# Altium PCB Group24_87557913_98040483_PCB_Wacky_R_CAR.PcbDoc (part 2 of 2)
Units mm, origin at the board's own origin, x right, y up, seen from the top; angles counter-clockwise.
Board outline 64 x 85 mm, 4 copper layers (Top Layer, Int1 (GND), Int2 (PWR), Bottom Layer), stack 1.369 mm thick; 115 components, 69 nets, 321 pads, 83 vias.
Unrouted connection lines stored in the file: 71.
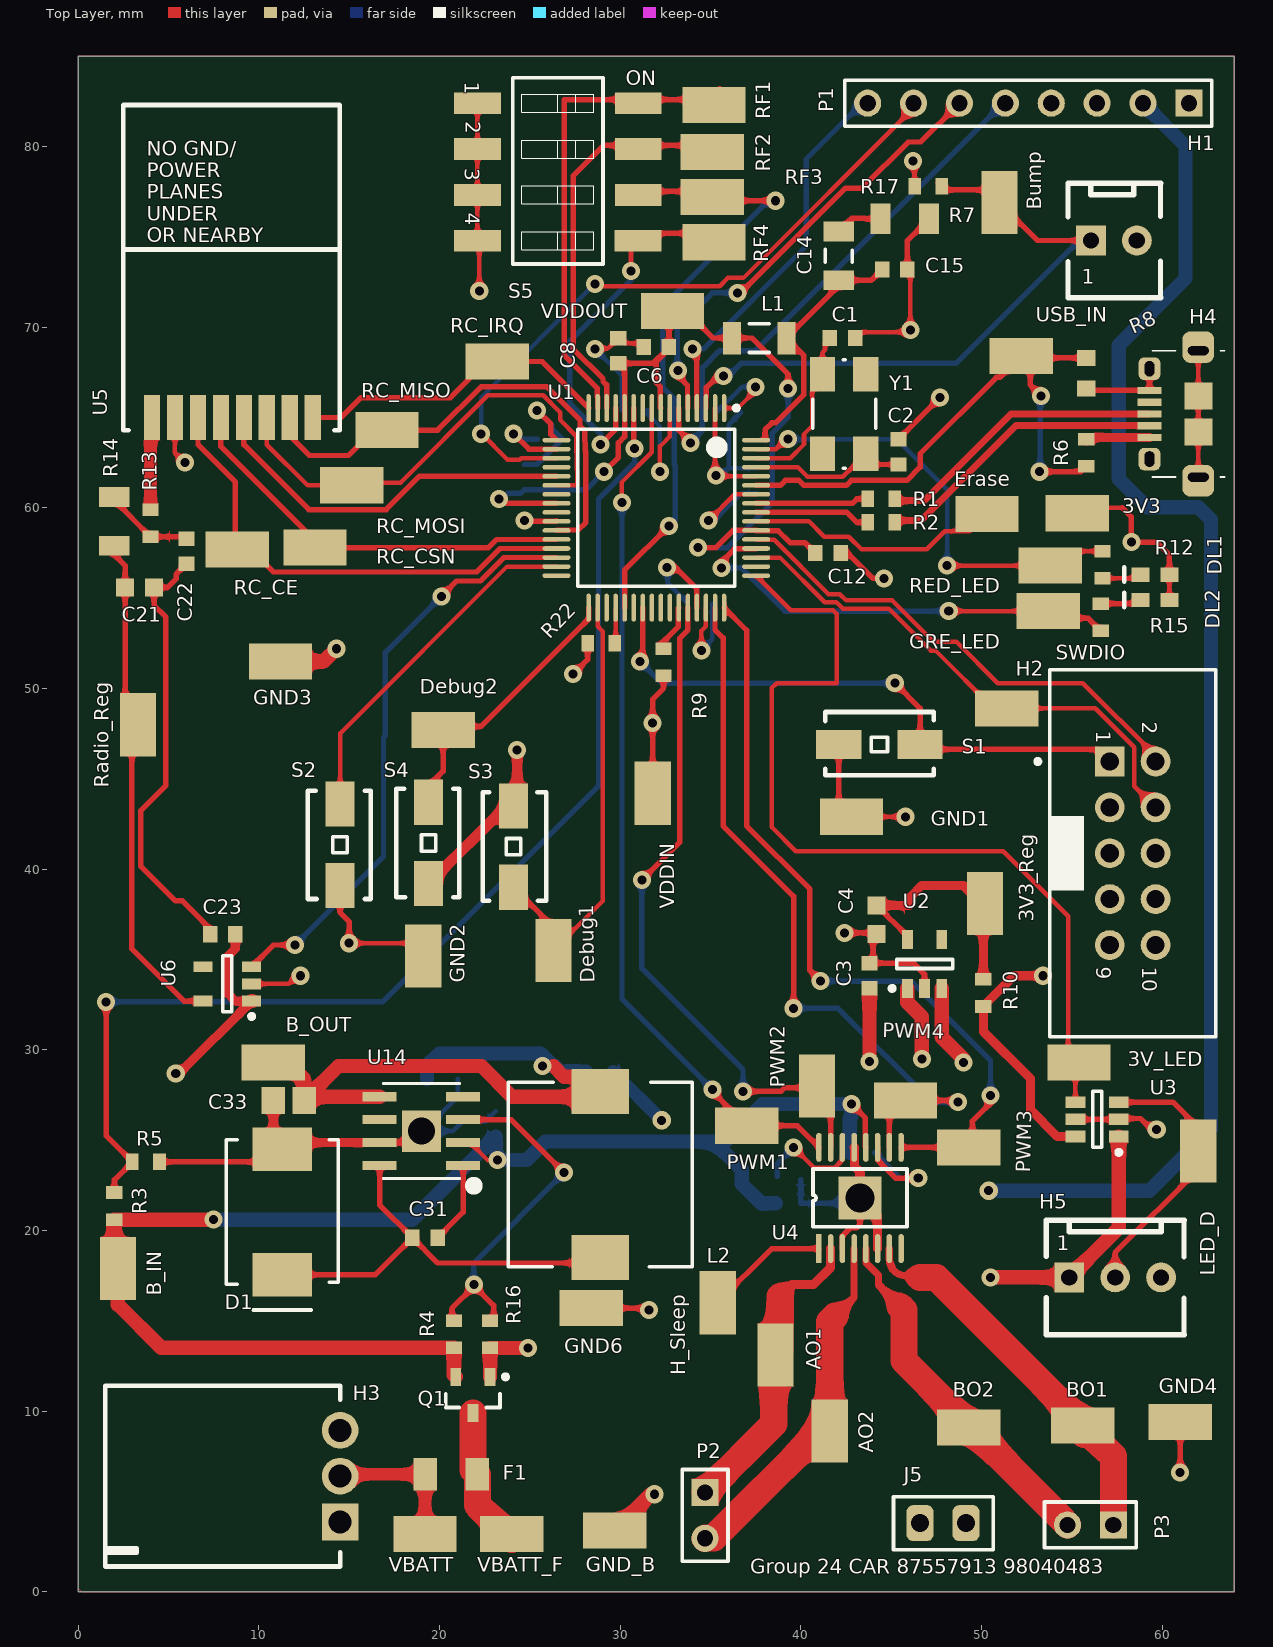
[diagram p0: Top Layer view]

## Polygon pours and split planes (outlines as drawn)
no net on Top Layer "NONET_L01_P016" (solid, remove dead copper, pour order 16): 0,85 0,0.2 0.2,0 64,0 64,85
no net on Top Layer "NONET_L01_P014" (hatched Horizontal grid 0.508 track 0.203, pour order 14): 0,85 64,85
no net on Top Layer "NONET_L01_P012" (hatched Horizontal grid 0.508 track 0.203, pour order 12): 53,27.7
no net on Top Layer "Top Layer-No Net" (solid, pour order 0): 0,85
no net on Bottom Layer "NONET_L04_P018" (solid, remove dead copper, pour order 18): 0,85 0,0 64,0 64,85
GND on Int1 (GND) (split plane): 63.49,0.51 0.51,0.51 0.51,67 20.1,67 20.1,84.49 63.49,84.49
3V3 on Int2 (PWR) (split plane): 63.49,13.3 52.8,13.3 52.8,17.2 52.3,17.7 52.3,31.3 0.51,31.3 0.51,52.371 16.1,52.371 16.15,52.38 16.192,52.408 18.892,55.108 18.92,55.15 18.929,55.2 18.929,67 20.1,67 20.1,84.49 63.49,84.49
3V3 on Int2 (PWR) (split plane): 17.171,57.554 13.546,53.929 0.51,53.929 0.51,55.206 1.508,54.208 1.55,54.18 1.6,54.171 13.3,54.171 13.35,54.18 13.392,54.208 17.092,57.908 17.12,57.95 17.129,58 17.129,66.7 17.12,66.75 17.092,66.792 17.05,66.82 17,66.829 16.95,66.82 16.908,66.792 16.846,66.729 0.6,66.729 0.55,66.72 0.51,66.693 0.51,67 17.171,67
no net on Int2 (PWR) (split plane): 18.671,55.254 16.046,52.629 0.51,52.629 0.51,53.671 13.6,53.671 13.65,53.68 13.692,53.708 17.392,57.408 17.42,57.45 17.429,57.5 17.429,66.871 18.671,66.871
5V on Int2 (PWR) (split plane): 51.371,17.3 51.38,17.25 51.408,17.208 51.671,16.946 51.671,12.4 51.68,12.35 51.708,12.308 51.75,12.28 51.8,12.271 63.49,12.271 63.49,0.51 17.129,0.51 17.129,12.2 17.12,12.25 17.106,12.271 17.1,12.279 17.1,12.8 16.7,12.8 16.701,12.629 16.7,12.629 16.7,12.8 11.15,12.8 11.15,12.5 11.15,0.51 0.51,0.51 0.51,30.4 51.371,30.4
VBAT on Int2 (PWR) (split plane): 16.702,12.315 16.749,0.51 11.9,0.51 11.9,12.2 16.7,12.2 16.7,12.317
3V3_RADIO on Int2 (PWR) (split plane): 16.871,58.054 13.246,54.429 1.654,54.429 0.729,55.354 0.729,62.9 0.729,66.471 16.871,66.471

## Other copper
Top Layer:
  pour cut-out: 0,85 20.1,85 20.1,67 0,67
Bottom Layer:
  pour cut-out: 0,85 20.1,85 20.1,67 0,67
Int1 (GND) (plane layer: these items are gaps in the copper):
  pour cut-out: 0,85 20.1,85 20.1,67 0,67
Int2 (PWR) (plane layer: these items are gaps in the copper):
  pour cut-out: 16.8,0.1 17.1,0.1 17.1,12.8 16.7,12.8 16.75,0.15
  region: 16.75,0.15
  region: 16.7,12.8
  pour cut-out: 11.15,12.5 11.15,12.8 16.7,12.8 16.7,12.2 11.15,12.2
  pour cut-out: 11.15,12.5 11.9,12.5 11.9,0.05 11.15,0.05
  pour cut-out: 0,30.4 51.5,30.4 51.5,17.2 51.6,17.2 51.8,17 51.8,12.4 64,12.4 64,13.3 52.8,13.3 52.8,17.2 52.3,17.7 52.3,31.3 0,31.3
  pour cut-out: 0,85 20.1,85 20.1,67 0,67
  lines w0.254: 18.7,67 17.3,67 17.3,57.5 13.6,53.8 0.2,53.8 0.2,52.5 16.1,52.5 18.8,55.2 18.8,67 ; 51.5,30.4 51.5,17.3 51.8,17 51.8,12.4 64,12.4 64,11.9 ; 0.6,55.3 1.6,54.3 5.8,54.3 13.3,54.3 17,58 17,66.7 16.9,66.6 0.6,66.6 0.6,62.9 0.6,55.3 ; 11.5,0.2 17,0.2 17,12.2 16.7,12.5 11.5,12.5 11.5,0.2

## Silkscreen, mask and mechanical layers (free items; w line width, h text height)
Top Overlay:
  text "Group 24 CAR 87557913 98040483" at 37.2,1 h0.8
Board Outline:
  the board outline again, w0.254

## Dimensions
0,86 to 64,86 on Mechanical 1
65,85 to 65,0 on Mechanical 1

## Text inside footprints (layer, text, board x,y; h text height)
H1: Top Overlay "1" at 55.56,72.4 h0.8
H2: Top Overlay "2" at 58.89,48.16 h0.8 r270; Top Overlay "1" at 56.35,47.66 h0.8 r270; Top Overlay "10" at 58.89,34.6 h0.8 r270; Top Overlay "9" at 56.35,34.6 h0.8 r270
H4: Mechanical 1 "PCB Edge" at 64.27,63.05 h0.8 r90
H5: Top Overlay "1" at 54.16,18.9 h0.8
S5: Top Overlay "4" at 21.425,76.325 h0.8 r270; Top Overlay "3" at 21.4,78.8 h0.8 r270; Top Overlay "2" at 21.45,81.4 h0.8 r270; Top Overlay "1" at 21.4,83.6 h0.8 r270; Top Overlay "ON" at 30.3,83.4 h0.8
U5: Top Overlay "NO GND/ / POWER / PLANES / UNDER / OR NEARBY" at 3.8,74.7 h0.8
U14: Mechanical 13 "*" at 20.93,24.344 h0.8 r180